# Altium PCB InWall_PCB.PcbDoc
Units mm, origin at the board's own origin, x right, y up, seen from the top; angles counter-clockwise.
Board outline 43.98 x 44 mm, 2 copper layers (Top Layer, Bottom Layer); 46 components, 24 nets, 152 pads, 0 vias.
Unrouted connection lines stored in the file: 82.
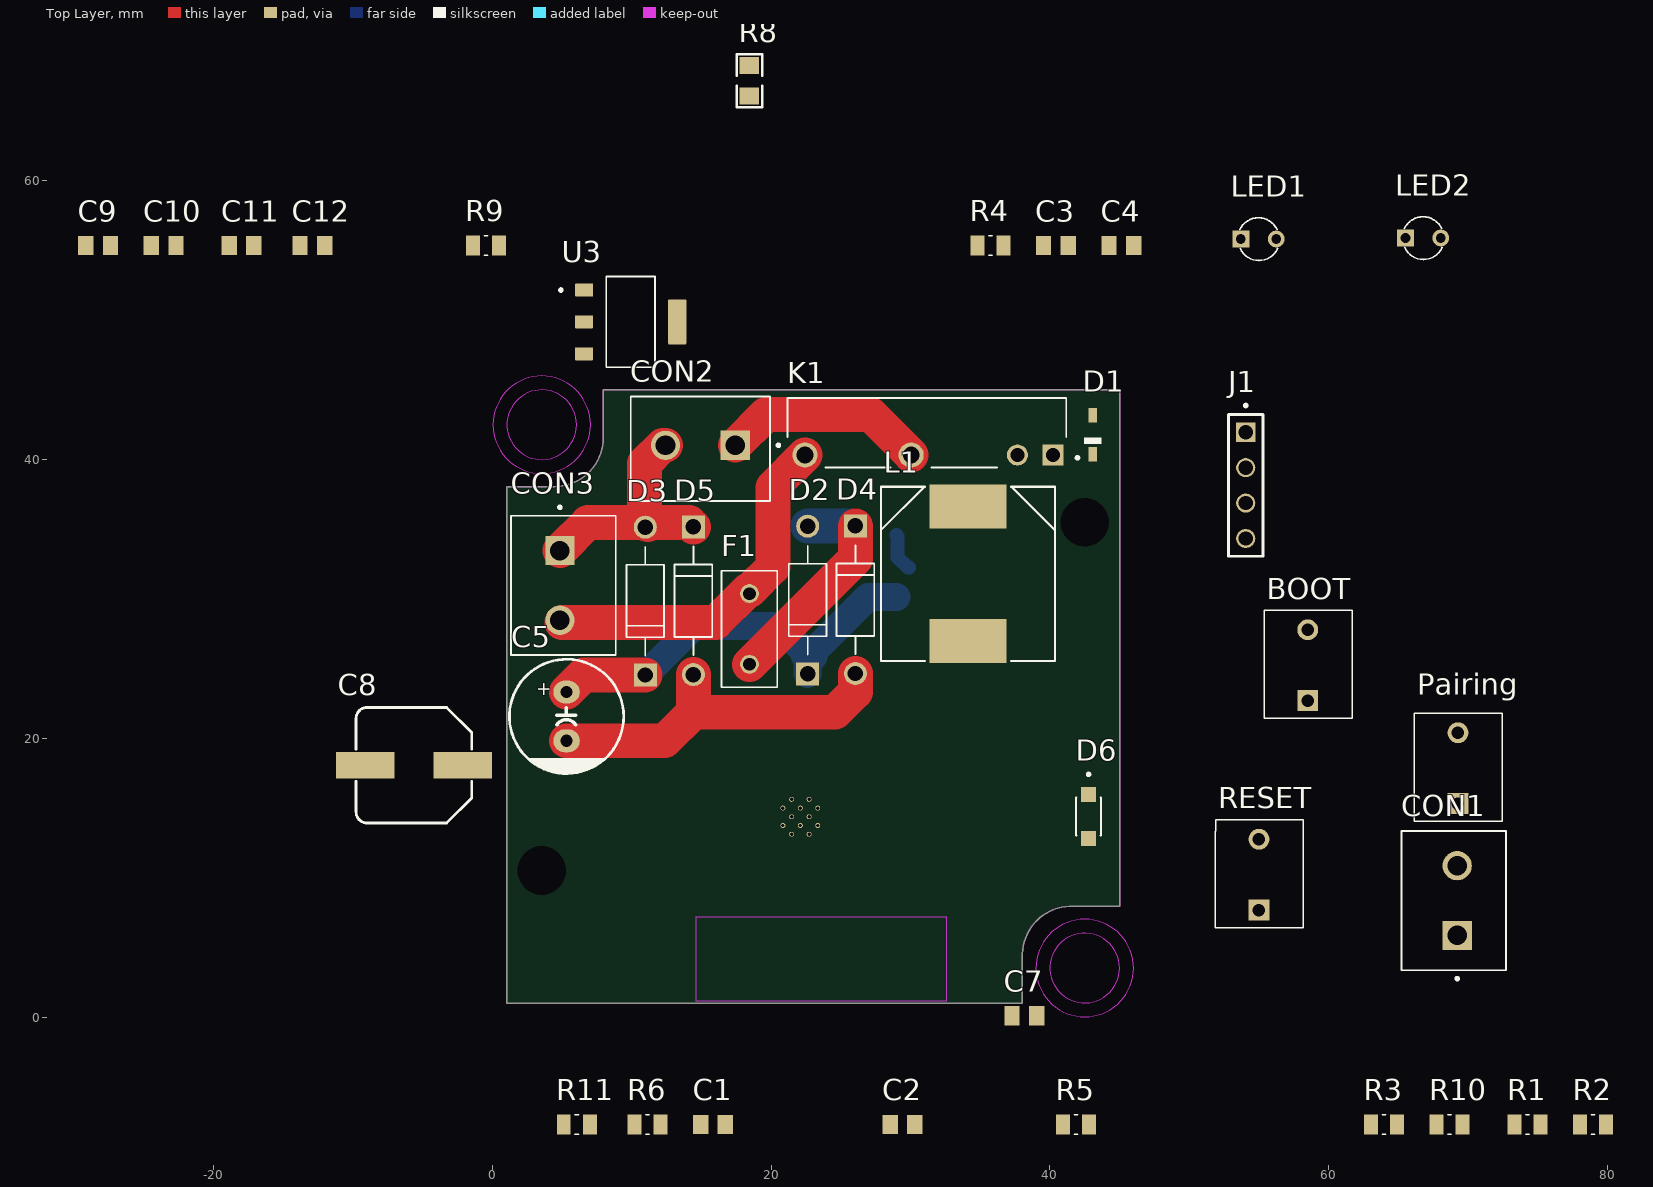
[diagram p0: Top Layer view]
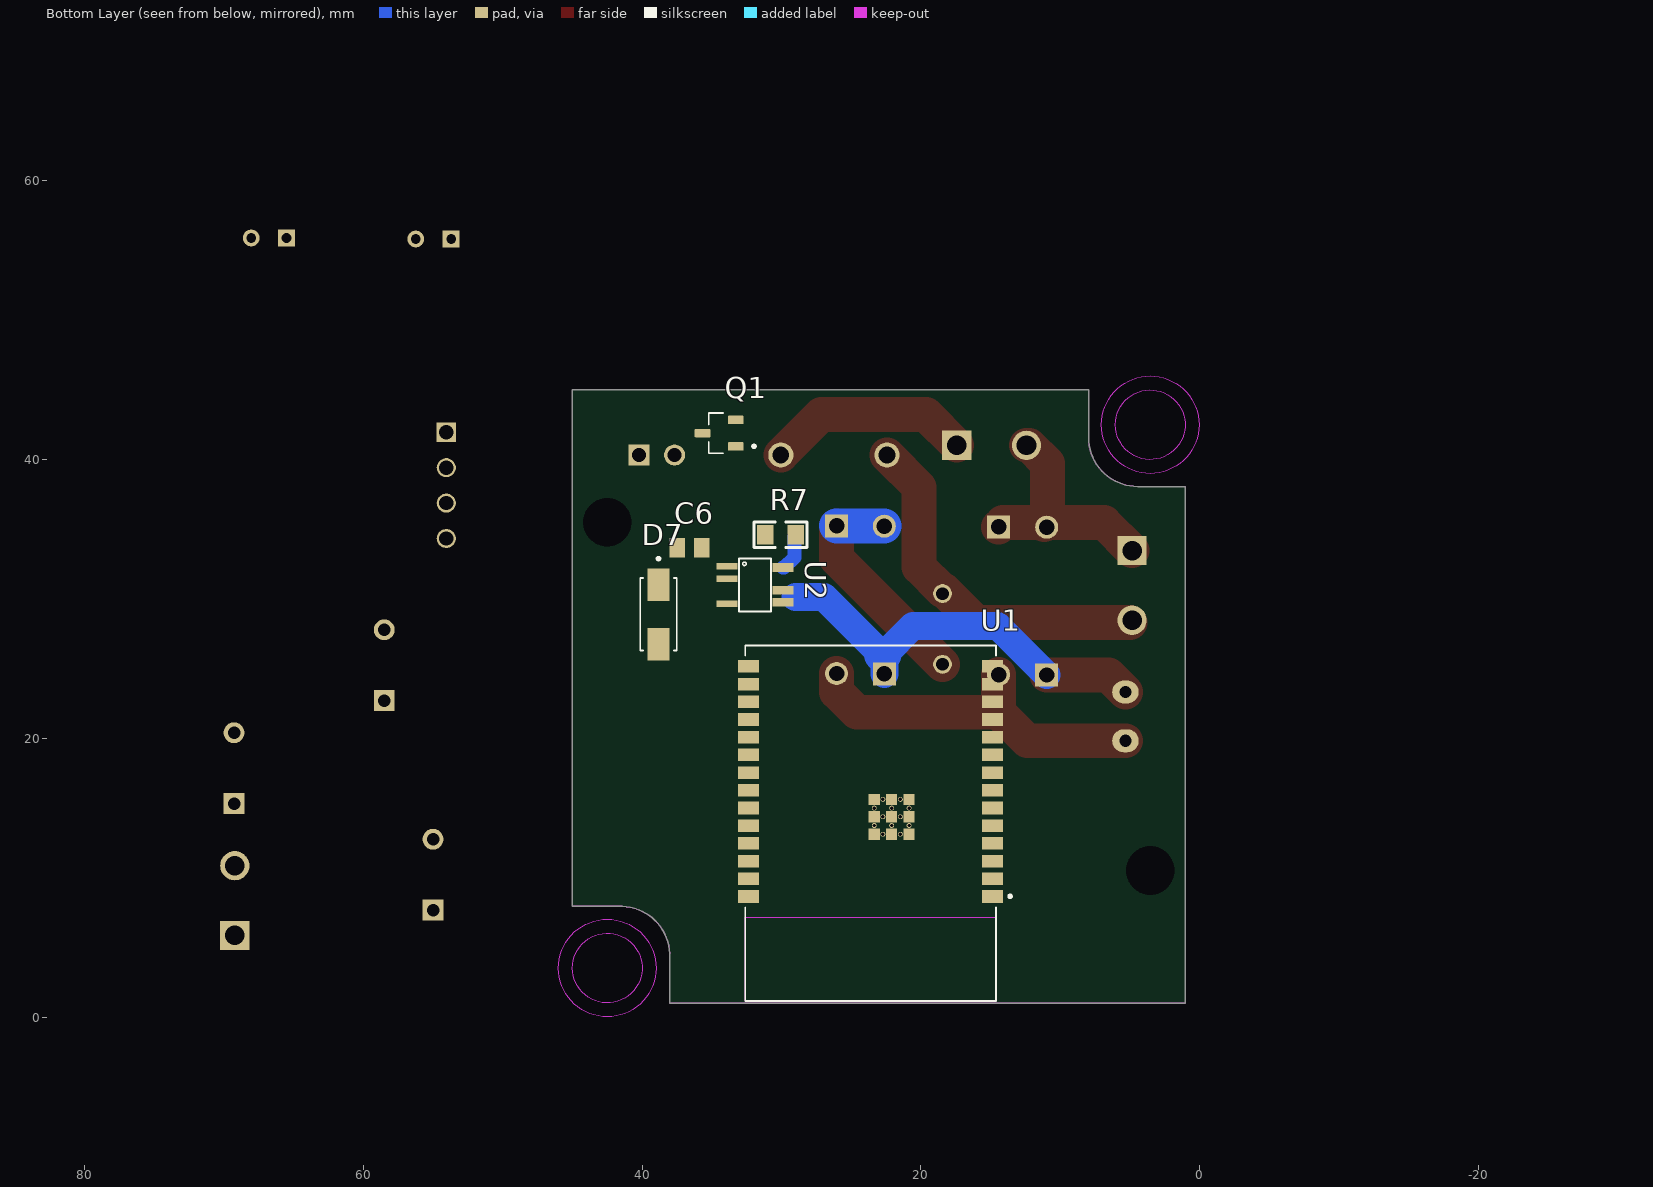
[diagram p1: Bottom Layer view, seen from below]

## Layer stack, top to bottom
Top Solder: solder mask 0.0102, Solder Resist, Dk 3.5
Top Layer: signal copper 0.0356
Dielectric 1: dielectric 0.32, FR-4, Dk 4.8
Bottom Layer: signal copper 0.0356
Bottom Solder: solder mask 0.0102, Solder Resist, Dk 3.5

## Board outline
1.038,1 1.025,38.064 4.439,38.064 ccw(c4.439,41.6) 7.975,41.6 7.975,45 45,45 45,7.961 41.437,7.961 41.437,7.958 ccw(c41.56,4.425) 38.027,4.548 38.025,4.548 38.025,1

## Design rules (kind name [scope] priority, off if disabled: settings)
Clearance [All] p1: gap=0.254 ignorepadtopadclearanceinfootprint=FALSE except(0: Arc-Hole Track-Hole SMDPad-Hole THPad-Hole Via-Hole Fill-Hole Poly-Hole Region-Hole Text-Hole)
PolygonConnect [All] p1: connectstyle=Relief reliefconductorwidth=0.254 reliefentries=4 polygonreliefangle="90 Angle" airgapwidth=0.254
RoutingVias [All] p1: holewidth=0.711 width=1.27 viastyle="Through Hole" minholewidth=0.711 minwidth=1.27 maxholewidth=0.711 maxwidth=1.27
SolderMaskExpansion [All] p1: expansion=0.102 istentingtop=FALSE
Width [All] p1: maxlimit=3 minlimit=0.254 preferedwidth=0.254 minimp=50.000000 maximp=50.000000 favimp=50.000000
30 further rules are at their usual default settings.

## Components (designator, comment, footprint, x,y, rotation, side; value= is the part's Value field where it differs from the comment)
BOOT "Push Button" "Push Button" 58.5,25.25 r0 top
C1 "100 nF" CAPC2012X90N 15.838,-7.694 r0 top
C2 "100 nF" CAPC2012X90N 29.427,-7.694 r0 top
C3 "100 nF/ 50V" CAPC2012X90N 40.429,55.356 r0 top
C4 "10 uF/ 25V" CAPC2012X90N 45.128,55.356 r0 top
C5 "2.2uF 450V" "Cap electrolitic radial 8x11.5-3.5" 5.325,23.325 r90 top value=1uF
C6 "1 uF/25V" CAPC2012X90N 36.6,33.675 r180 bottom
C7 "100 nF" CAPC2012X90N 38.165,0.1 r0 top
C8 "865080153014" WCAP-ASLI_8x10.5 -5.625,18.075 r0 top value="470uF, 16V"
C9 "100 nF" CAPC2012X90N -28.278,55.356 r0 top
C10 "10 uF/ 25V" CAPC2012X90N -23.579,55.356 r0 top
C11 "10 uF/ 25V" CAPC2012X90N -17.991,55.356 r0 top
C12 "100 nF" CAPC2012X90N -12.911,55.356 r0 top
CON1 "KF301-2P" HANDSON_KF301-2P 69.224,8.364 r90 top
CON2 "KF301-2P" HANDSON_KF301-2P 14.925,41.025 r180 top
CON3 "KF301-2P" HANDSON_KF301-2P 4.85,30.975 r270 top
D1 "1N4148WS" SODFL2512X100N 43.075,41.775 r90 top
D2 "1N4007" DIOAD1060W80L520D270 22.625,29.925 r90 top
D3 "1N4007" DIOAD1060W80L520D270 10.975,29.85 r90 top
D4 "1N4007" DIOAD1060W80L520D270 26.05,29.95 r270 top
D5 "1N4007" DIOAD1060W80L520D270 14.425,29.875 r270 top
D6 "ES1JLW" SODFL3718X102N 42.775,14.4 r270 top
D7 "US1A-13-F" DIOM5226X240N 38.825,28.9 r270 bottom
F1 "0697H1000-02" FUSRR508W60L835T400H810 18.45,27.85 r270 top
J1 "HTSW-104-07-G-S" SAMTEC_HTSW-104-07-G-S 54.05,38.15 r90 top
K1 "HF49FD/005-1H12T" RELAY_HF49FD/005-1H12T 31.18,41.925 r180 top
L1 "DR127-470uH" INDM125125X800N 34.125,31.8 r270 top
LED1 "LED_Power" LEDRD254W50D305H520P 54.97,55.825 r0 top
LED2 "LED_Power" LEDRD254W50D305H520P 66.775,55.9 r0 top
Pairing "Push Button" "Push Button" 69.275,17.865 r0 top
Q1 "AO3400-5.8A" SOT95P260X140-3N 34.475,41.9 r0 bottom
R1 "10K" RESC2012X65N 74.258,-7.694 r0 top
R2 "10K" RESC2012X65N 78.957,-7.694 r0 top
R3 "10K" RESC2012X65N 63.971,-7.694 r0 top
R4 "3.3K" RESC2012X65N 35.73,55.356 r0 top
R5 "100 Ohm" RESC2012X65N 41.873,-7.694 r0 top
R6 "10K" RESC2012X65N 11.139,-7.694 r0 top
R7 "Res1" SMD_805_Res 30.075,34.625 r270 bottom value=؟
R8 "1000" SMD_805_Res 18.42,67.18 r0 top value=100
R9 "330" RESC2012X65N -0.465,55.356 r0 top
R10 "10K" RESC2012X65N 68.67,-7.694 r0 top
R11 "330" RESC2012X65N 6.059,-7.694 r0 top
RESET "Push Button" "Push Button" 55,10.225 r0 top
U1 "ESP32-C6-WROOM-1-N8" XCVR_ESP32-C6-WROOM-1-N8 23.605,13.915 r0 bottom
U2 "BP2525" BP2525 31.9,31 r180 bottom
U3 "AMS1117-3.3" SOT229P700X180-4N 9.925,49.875 r0 top

## Footprints (in the part's own frame and the unit in brackets; to place one, negate y for a bottom-side part, rotate by r counter-clockwise, add the part's x,y. Pads: shape width x height; smd on the part's side, far side on the other; paste and mask are expansions set on the pad)
BP2525 [mm]
  rect 1.5x0.46 smd: 1(-2,1.35) 2(-2,0.45) 3(-2,-1.35)
  rect 1.5x0.6 smd: 4(2,-1.235) 4(2,-0.385)
  rect 1.5x0.66 smd: 5(2,1.25)
  silkscreen extent -1.14,-1.91 1.14,1.91, body extent -2.11,-2 2.11,2, height 1.25
"Cap electrolitic radial 8x11.5-3.5" [mil]
  oval 65x75 hole 35: 1(0,0) 2(-137.8,0)
  silkscreen extent -230,-161 92,161, body extent -228,-159 89,158, height 473
CAPC2012X90N [mm]
  rect 1.1x1.38 smd: 1(-0.885,0) 2(0.885,0)
  body extent -1,-0.63 1,0.63, height 0.9
DIOAD1060W80L520D270 [mm]
  round 1.65 hole 1.1: A(5.3,0)
  rect 1.65x1.65 / inner round 1.65 / far side rect 1.65x1.65 hole 1.1: C(-5.3,0)
  silkscreen extent -3.9,-1.35 3.9,1.35, body extent -5.57,-1.35 5.57,1.35, height 2.7
DIOM5226X240N [mm]
  rect 2.33x1.55 smd: A(2.135,0) C(-2.135,0)
  silkscreen extent -4.1,-1.3 2.6,1.3, body extent -2.6,-1.3 2.6,1.3, height 2.4
FUSRR508W60L835T400H810 [mm]
  round 1.35 hole 0.9: 1(-2.54,0) 2(2.54,0)
  silkscreen extent -4.18,-2 4.18,2, body extent -4.18,-2 4.18,2, height 8.1
HANDSON_KF301-2P [mm]
  rect 2.1x2.1 / inner round 2.1 / far side rect 2.1x2.1 hole 1.4: 1(-2.5,0)
  round 2.1 hole 1.4: 2(2.5,0)
  silkscreen extent -5.7,-3.5 5,4, body extent -5.6,-3.75 5,3.75, height 10
INDM125125X800N [mil]
  rect 124x217 smd: 1(-190,0) 2(190,0)
  silkscreen extent -246,-246 246,246, body extent -246,-246 246,246, height 315
LEDRD254W50D305H520P [mm]
  rect 1.208x1.208 / inner round 1.208 / far side rect 1.208x1.208 hole 0.7: A(-1.27,0)
  round 1.208 hole 0.7: C(1.27,0)
  silkscreen extent -1.34,-1.54 1.36,1.52, body extent -1.59,-1.9 1.91,1.9, height 6.71
"Push Button" [mm]
  rect 1.5x1.5 hole 0.9: 1(0,-2.54)
  round 1.5 hole 0.9: 2(0,2.54)
  silkscreen extent -3.13,-3.81 3.19,3.94
RELAY_HF49FD/005-1H12T [mm]
  rect 1.508x1.508 hole 1: 1(-9.03,1.6)
  round 1.508 hole 1: 2(-6.49,1.6)
  round 1.8 hole 1.2: 3(1.13,1.6) 4(8.75,1.6)
  silkscreen extent -10.9,-2.5 10,2.5
RESC2012X65N [mm]
  rect 1x1.42 smd: 1(-0.935,0) 2(0.935,0)
  silkscreen extent -0.12,-0.7 0.12,0.7, body extent -1,-0.63 1,0.63, height 0.65
SAMTEC_HTSW-104-07-G-S [mm]
  rect 1.37x1.37 / inner round 1.37 / far side rect 1.37x1.37 hole 1.02: 01(3.81,0)
  round 1.37 hole 1.02: 02(1.27,0) 03(-1.27,0) 04(-3.81,0)
  silkscreen extent -5.08,-1.24 5.83,1.24
SMD_805_Res [mm]
  rect 1.4x1.2 smd: 1(0.025,1.092) 2(0.025,-1.092)
  Top Layer pour cut-out: -0.991,0.508 -0.991,-0.483 1.041,-0.483 1.041,0.508
  silkscreen extent -0.89,-1.91 0.94,1.91, body extent -0.65,-1.15 0.7,1.15, height 0.76
SODFL2512X100N [mm]
  rect 1.05x0.6 smd: A(1.4,0) C(-1.4,0)
  silkscreen extent -0.63,-0.63 -0.2,0.63, body extent -1.25,-0.63 1.25,0.63, height 1.1
SODFL3718X102N [mm]
  rect 1.08x1.09 smd: A(1.575,0) C(-1.575,0)
  silkscreen extent -3.11,-0.9 1.38,0.9, body extent -1.85,-0.9 1.85,0.9, height 1.02
SOT95P260X140-3N [mm]
  rrect25% 1.14x0.6 smd: 1(-1.19,0.95) 2(-1.19,-0.95) 3(1.19,0)
  silkscreen extent -2.6,-1.45 0.75,1.45, body extent -1.3,-1.45 1.3,1.45, height 1.4
SOT229P700X180-4N [mm]
  rrect15% 1.31x0.93 smd: 1(-3.345,2.29) 2(-3.345,0) 3(-3.345,-2.29)
  rrect15% 1.31x3.24 smd: 4(3.345,0)
  silkscreen extent -5.1,-3.25 1.75,3.25, body extent -3.25,-3.5 3.25,3.5, height 1.8
WCAP-ASLI_8x10.5 [mm]
  rect 4.2x1.9 smd: 1(3.5,0) 2(-3.5,0)
  silkscreen extent -4.15,-4.15 4.15,4.15, body extent -4.5,-4.15 4.5,4.15, height 10.5
XCVR_ESP32-C6-WROOM-1-N8 [mm]
  rect 1.5x0.9 smd: 1(-8.75,5.26) 2(-8.75,3.99) 3(-8.75,2.72) 4(-8.75,1.45) 5(-8.75,0.18) 6(-8.75,-1.09) 7(-8.75,-2.36) 8(-8.75,-3.63) 9(-8.75,-4.9) 10(-8.75,-6.17) 11(-8.75,-7.44) 12(-8.75,-8.71) 13(-8.75,-9.98) 14(-8.75,-11.25) 15(8.75,-11.25) 16(8.75,-9.98) 17(8.75,-8.71) 18(8.75,-7.44) 19(8.75,-6.17) 20(8.75,-4.9) 21(8.75,-3.63) 22(8.75,-2.36) 23(8.75,-1.09) 24(8.75,0.18) 25(8.75,1.45) 26(8.75,2.72) 27(8.75,3.99) 28(8.75,5.26)
  rect 0.8x0.8 smd: 29_1(-2.755,0.79) 29_2(-1.505,0.79) 29_3(-0.255,0.79) 29_4(-2.755,-0.46) 29_5(-1.505,-0.46) 29_6(-0.255,-0.46) 29_7(-2.755,-1.71) 29_8(-1.505,-1.71) 29_9(-0.255,-1.71)
  round 0.35 hole 0.25 mask+0: 30_1(-2.13,0.79) 30_2(-0.88,0.79) 30_3(-2.755,0.165) 30_4(-1.505,0.165) 30_5(-0.255,0.165) 30_6(-2.13,-0.46) 30_7(-0.88,-0.46) 30_8(-2.755,-1.085) 30_9(-1.505,-1.085) 30_10(-0.255,-1.085) 30_11(-2.13,-1.71) 30_12(-0.88,-1.71)
  Keep-Out Layer region: 9,6.75 -9,6.75 -9,12.75 9,12.75
  silkscreen extent -10.1,-12.75 9,12.75, body extent -9,-12.75 9,12.75, height 3.25

## Part data
C1 C2 C3 C4 C6 C7 C9 C10 C11 C12: library part VJ0805Y104KXXCW1BC, "Capacitor: ceramic; MLCC; 100nF; 25V; X7R; Â±10%; SMD; 0805", Package="0805-2 VISHAY", Check_prices=https://www.snapeda.com/parts/VJ0805Y104KXXCW1BC/Vishay/view-part/?ref=eda, MF="Vishay Vitramon", MP=VJ0805Y104KXXCW1BC, SnapEDA_Link=https://www.snapeda.com/parts/VJ0805Y104KXXCW1BC/Vishay/view-part/?ref=snap
C5: library part "Cap ELECTROLITIC TOTAL SIZE", "Cap electrolitic radial", Data=16-12-2016, Designer="Abbas Basereh"
C8: "WCAP-ASLI Aluminum Electrolytic Capacitors, size Ф8x10.5mm, 6.3V DC, 1mF", Operating Temperature="-55 °C up to +105 °C", Rated Voltage="6.3V DC", ComponentLink1Description=Manufacturer, ComponentLink1URL=http://www.we-online.de, ComponentLink2Description=Datasheet, ComponentLink2URL=http://katalog.we-online.de/pbs/datasheet/865080153014.pdf, Life Cycle=2000h, Part Number=865080153014, Published Date="June 2017", Publisher="Wurth Elektronik", Size=Ф8x10.5mm
CON1 CON2 CON3: "2 Pin Terminal Block 5mm Pitch", Package=None, Check_prices=https://www.snapeda.com/parts/KF301-2P/Handson+Technology/view-part/?ref=eda, MF="Handson Technology", MP=KF301-2P, SnapEDA_Link=https://www.snapeda.com/parts/KF301-2P/Handson+Technology/view-part/?ref=snap
D1: "Diode Standard 75V 300mA (DC) Surface Mount SOD-323", Package="SOD-323FL-2 ON Semiconductor", Availability="In Stock", MF="ON Semiconductor", MP=1N4148WS, Price=None, Purchase-URL=https://pricing.snapeda.com/search/part/1N4148WS/?ref=eda
D2 D3 D4 D5: "Rectifier Silicon, 1000V, 1 A, DO-41 Case, Solder Leads, 1N Series", Package="DO-41 NTE Electronics", Check_prices=https://www.snapeda.com/parts/1N4007/NTE+Electronics/view-part/?ref=eda, MF="NTE Electronics, Inc.", MP=1N4007, SnapEDA_Link=https://www.snapeda.com/parts/1N4007/NTE+Electronics/view-part/?ref=snap
D6 J1 Q1: Package=None, Availability=Unavailable, Price=None
  D6: MF="Taiwan Semiconductor", MP=ES1JLW
  J1: MP=HTSW-104-07-G-S
  Q1: MF="{'manufacturer': u'MDD'}", MP=AO3400-5.8A
D7: "Diode Standard 50V 1A Surface Mount SMA", Package="DO-214 Diodes Inc.", Availability=Good, Check_prices=https://www.snapeda.com/parts/US1A-13-F/Diodes%20Inc./view-part/516589/?ref=eda, MF="Diodes Inc.", MP=US1A-13-F, Price=None, Purchase-URL=https://pricing.snapeda.com/search/part/US1A-13-F/?ref=eda, SnapEDA_Link=https://www.snapeda.com/parts/US1A-13-F/Diodes%20Inc./view-part/516589/?ref=snap
F1: "2-Pin Radial Fuse", Package="Radial Box  Bel Fuse", Check_prices=https://www.snapeda.com/parts/0697H1000-02/Bel+Circuit+Protection/view-part/?ref=eda, MF="Bel Fuse", MP=0697H1000-02, SnapEDA_Link=https://www.snapeda.com/parts/0697H1000-02/Bel+Circuit+Protection/view-part/?ref=snap
K1: "Relay: electromagnetic; SPST-NO; Ucoil: 5VDC; 5A/250VAC; 5A/30VDC", Package=None, Availability=Unavailable, MF=Hongfa, MP=HF49FD/005-1H12T, Price=None, SnapEDA_Link=https://www.snapeda.com/parts/HF49FD/005-1H12T/Hongfa/view-part/2753221/?ref=snap
L1: library part DR127-221-R, "Inductor Power Shielded Drum Core 221.5uH/220uH 20% 100KHz Ferrite 1.29A 376mOhm DCR T/R", Package="Nonstandard Eaton", Availability="In Stock", Check_prices=https://www.snapeda.com/parts/DR127-221-R/Eaton/view-part/?ref=eda, MF=Eaton, MP=DR127-221-R, Price=None, Purchase-URL=https://pricing.snapeda.com/search/part/DR127-221-R/?ref=eda, SnapEDA_Link=https://www.snapeda.com/parts/DR127-221-R/Eaton/view-part/?ref=snap
LED1 LED2: library part OVLAW4CB7, "Ovlaw4Cb7 White LED 3mm (T-1) Round Lens Through Hole Package", Package=Package, Check_prices=https://www.snapeda.com/parts/OVLAW4CB7/TT+Electronics%252FOptek/view-part/?ref=eda, MF="TT Electronics/Optek", MP=OVLAW4CB7, SnapEDA_Link=https://www.snapeda.com/parts/OVLAW4CB7/TT+Electronics%252FOptek/view-part/?ref=snap
R1 R2 R3 R4 R5 R6 R9 R10 R11: library part RN73C2A5K11BTD, "RES SMD 5.11KOHM 0.1% 1/10W 0805", Package=0805, Power_Rating=".1 W", Resistance=5.11K, Tolerance=.1%, Check_prices=https://www.snapeda.com/parts/RN73C2A5K11BTD/TE+Connectivity+Passive+Product/view-part/?ref=eda, EU_RoHS_Compliance=Compliant, MF="TE Connectivity", MP=RN73C2A5K11BTD, SnapEDA_Link=https://www.snapeda.com/parts/RN73C2A5K11BTD/TE+Connectivity+Passive+Product/view-part/?ref=snap
R7 R8: library part "Res 805", "Resistor", LatestRevisionDate=17-Jul-2002, LatestRevisionNote="Re-released for DXP Platform.", PackageReference=AXIAL-0.3, Published=8-Jun-2000, Publisher="Altium Limited"
U1: "Multiprotocol Modules ESP32-C6 module, Wi-Fi 6 in 2.4 GHz band, Bluetooth 5, Zigbee 3.0 and Thread. ESP34-WROOM Compatible - ENGINEERING SAMPLE", Package="SMD-28 Espressif Systems", Check_prices=https://www.snapeda.com/parts/ESP32-C6-WROOM-1-N8/Espressif+Systems/view-part/?ref=eda, MF="Espressif Systems", MP=ESP32-C6-WROOM-1-N8, SnapEDA_Link=https://www.snapeda.com/parts/ESP32-C6-WROOM-1-N8/Espressif+Systems/view-part/?ref=snap
U2: "ultra-low standby power consumption non-isolated stepdown constant voltage driver"
U3: "Sot223/Pkg 1-Amp 3.3-Volt Low Drop Out Voltage Regulatator", Package="SOT-223 Seeed Technology", Check_prices=https://www.snapeda.com/parts/AMS1117-3.3/Advanced+Monolithic+Systems/view-part/?ref=eda, MF="Advanced Monolithic Systems", MP=AMS1117-3.3, SnapEDA_Link=https://www.snapeda.com/parts/AMS1117-3.3/Advanced+Monolithic+Systems/view-part/?ref=snap

## Free pads (board coordinates)
  round 0 hole 3.5: 2(42.5,35.5) 3(3.55,10.525)

## Nets (pads, with @x,y where several pads share a name; then routed paths per layer and width w, separated by ;. In a path a pad name is that pad's centre, name@x,y a point inside that pad or via, vN(x,y) a via of type N, cw(c..) or ccw(c..) an arc to the next point about the centre after c; other vN are vias at no path point)
3V3: C3.2 C4.2 C11.2 C12.2 CON1.1 J1.01 R1.1 R2.1 R4.2 R9.1 R10.1 U1.2 U3.2
5V: C7.2 C8.1 C9.2 C10.2 D1.C D7.A K1.1 L1.1 R8.2 U3.3
BOOT: BOOT.1 C2.2 R2.2 U1.15
Drain: C5.1 D2.C D3.C U2.4 | length 29.6
  Top Layer w2.5: C5.1 6.55,24.55 D3.C
  Bottom Layer w2: D3.C 14.5,28.075 20.575,28.075 22.625,26.025 D2.C ; 22.825,26.025 26.95,30.15 29,30.15
  Bottom Layer w2.5: 22.625,26.025 22.825,26.025
EN: C1.2 R1.2 RESET.1 U1.3
GND: BOOT.2 C1.1 C2.1 C3.1 C4.1 C5.2 C7.1 C8.2 C9.1 C10.1 C11.1 C12.1 D4.A D5.A D6.A J1.04 LED1.C LED2.C Pairing.2 Q1.2 R3.2 R6.1 R8.1 RESET.2 U1.1 U1.28 U1.29_1 U1.29_2 U1.29_3 U1.29_4 U1.29_5 U1.29_6 U1.29_7 U1.29_8 U1.29_9 U2.2 U3.1 | length 26.2
  Top Layer w2.5: C5.2 12.375,19.825 14.425,21.875 ; D5.A 14.425,21.875 ; D4.A 26.05,23.339 24.586,21.875 14.425,21.875
L_out: CON2.1 K1.3 | length 14.7
  Top Layer w2.5: CON2.1 19.625,43.225 27.15,43.225 K1.3
LED: R11.1 U1.20
NetC6_1: C6.1 D7.C U2.3
NetC6_2: C6.2 D6.C L1.2 R7.2 U2.1
NetD1_A: D1.A K1.2 Q1.3
NetD2_A: D2.A D4.C F1.2 | length 16.5
  Top Layer w2.5: F1.2 26.05,32.91 D4.C
  Bottom Layer w2.5: D2.A 26.025,35.225 D4.C
NetLED1_A: LED1.A R9.2
NetLED2_A: LED2.A R11.2
NetQ1_1: Q1.1 R5.2 R6.2
NetR4_1: R4.1 U1.10
NetR7_1: R7.1 U2.5 | length 2.8
  Bottom Layer w1: R7.1 29.083,34.5 29.083,32.987 29.82,32.25 U2.5
NULL: CON2.2 CON3.1 D3.A D5.C | length 17.1
  Top Layer w2.5: CON3.1 6.85,35.475 11,35.475 D3.A@11.15,35.325 ; CON2.2 12.225,41.025 10.925,39.725 10.925,35.475 14.125,35.475 D5.C
Pairing: Pairing.1 R10.2 U1.21
Phase: CON3.2 F1.1 K1.4 | length 25.7
  Top Layer w2.5: CON3.2@5,28.325 16.035,28.325 F1.1@18.375,30.665 ; F1.1@18.45,30.6 20.125,32.275 20.125,38.02 K1.4
Relay_Signal: R5.1 U1.19
RXD: J1.02 U1.24
S1: CON1.2 R3.1 U1.18
TXD: J1.03 U1.25
pads on no net: U1.4 U1.5 U1.6 U1.7 U1.8 U1.9 U1.11 U1.12 U1.13 U1.14 U1.16 U1.17 U1.22 U1.23 U1.26 U1.27 U1.30_1 U1.30_2 U1.30_3 U1.30_4 U1.30_5 U1.30_6 U1.30_7 U1.30_8 U1.30_9 U1.30_10 U1.30_11 U1.30_12 U3.4

## Keep-outs
Keep-Out Layer:
  circle w0.05: c42.5,3.525 r2.5
  circle w0.05: c42.5,3.525 r3.5
  circle w0.05: c3.55,42.5 r3.5
  circle w0.05: c3.55,42.5 r2.5
  lines w0.05: 1.025,38.05 1.025,1 38.025,1 38.025,4.548 ; 1.025,38.064 4.439,38.064 ccw(c4.439,41.6) 7.975,41.6 7.975,45 45,45 45,7.961 41.437,7.961 ; 38.027,4.548 cw(c41.561,4.425) 41.437,7.958

## Text inside footprints (layer, text, board x,y; h text height)
C5: Top Overlay "+" at 4.105,22.935 h1 r90